# Altium PCB PCB3.PcbDoc
Units mil, origin at the board's own origin, x right, y up, seen from the top; angles counter-clockwise.
Board outline 1140.68 x 645 mil, 2 copper layers (Top Layer, Bottom Layer); 8 components, 15 nets, 53 pads, 6 vias.
Unrouted connection lines stored in the file: 6.
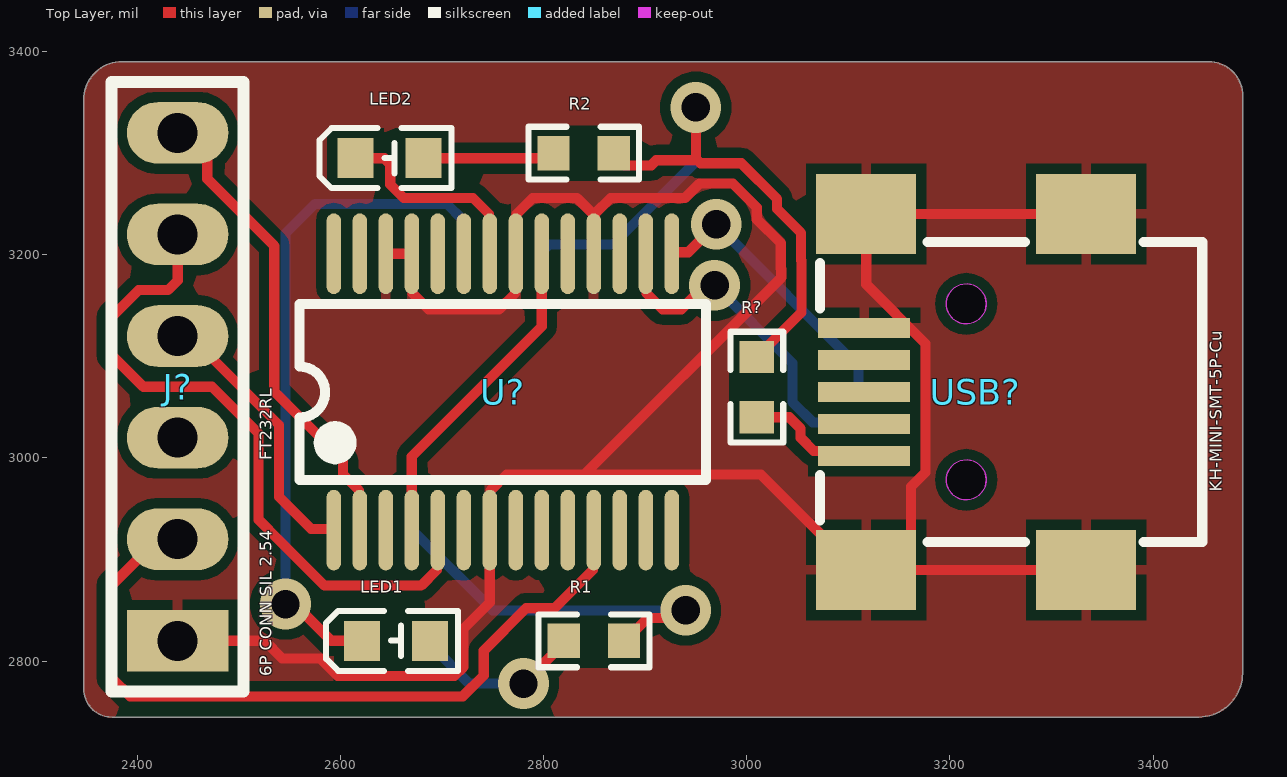
[diagram p0: Top Layer view]
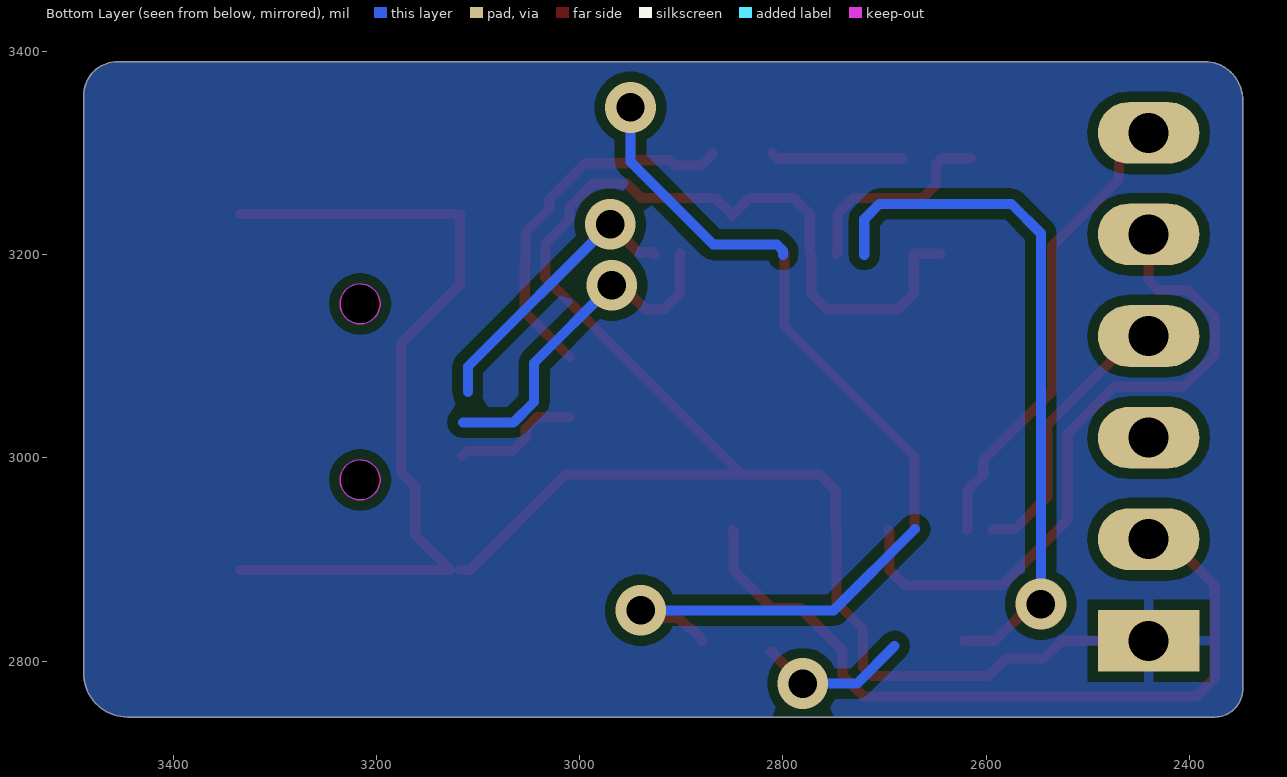
[diagram p1: Bottom Layer view, seen from below]

## Layer stack, top to bottom
Top Solder: solder mask 0.4, Solder Resist, Dk 3.5
Top Layer: signal copper 1.4
Dielectric 1: dielectric 12.6, FR-4, Dk 4.8
Bottom Layer: signal copper 1.4
Bottom Solder: solder mask 0.4, Solder Resist, Dk 3.5

## Board outline
2375,2745 3445,2745 ccw(c3445,2788.18) 3488.18,2788.18 3488.18,3356.82 ccw(c3455,3356.82) 3455,3390 2385,3390 ccw(c2385,3352.5) 2347.5,3352.5 2347.5,2772.5 ccw(c2375,2772.5)

## Design rules (kind name [scope] priority, off if disabled: settings)
Clearance [All] p1: gap=10 ignorepadtopadclearanceinfootprint=FALSE
PolygonConnect [All] p1: connectstyle=Relief reliefconductorwidth=10 reliefentries=4 polygonreliefangle="90 Angle" airgapwidth=10
RoutingVias [All] p1: holewidth=28 width=50 viastyle="Through Hole" minholewidth=28 minwidth=50 maxholewidth=28 maxwidth=50
SolderMaskExpansion [All] p1: expansion=4 istentingtop=FALSE
SupplyNets "Schematic Supply Nets" [InNet('GND')] p1: voltage=0.000
Width [All] p1: maxlimit=10 minlimit=10 preferedwidth=10
30 further rules are at their usual default settings.

## Classes and differential pairs
component class Sheet3: J? LED1 R1 R2 U? USB?

## Components (designator, comment, footprint, x,y, rotation, side; value= is the part's Value field where it differs from the comment)
J? "6P CONN SIL 2.54" "6P CONN SIL 2.54" 2440,3070 r0 top
LED1 "YLED0603R" LED0603-FD 2655,2820 r180 top
LED2 "YLED0603R" LED0603-FD 2648.47,3295 r180 top
R1 "2kΩ" R0603 2849.66,2820 r0 top
R2 "2kΩ" R0603 2839.66,3300 r0 top
R? "2kΩ" R0603 3010,3069.66 r90 top
U? "FT232RL" SSOP-28_L10.2-W5.3-P0.65-LS7.8-BL 2760,3065 r0 top
USB? "KH-MINI-SMT-5P-Cu" MINI-USB-SMD_KH-MINI-SMT-5P-CU 3225,3065 r90 top

## Footprints (in the part's own frame and the unit in brackets; to place one, negate y for a bottom-side part, rotate by r counter-clockwise, add the part's x,y. Pads: shape width x height; smd on the part's side, far side on the other; paste and mask are expansions set on the pad)
"6P CONN SIL 2.54" [mm]
  rect 2.54x1.54 hole 1 paste-2539.97 mask+0.2: 1(0,-6.35)
  oval 2.54x1.54 hole 1 paste-2539.97 mask+0.2: 2(0,-3.81) 3(0,-1.27) 4(0,1.27) 5(0,3.81) 6(0,6.35)
  silkscreen extent -1.65,-7.62 1.65,7.62
LED0603-FD [mm]
  rect 0.9x1 smd: 1(-0.85,0) 2(0.85,0)
  silkscreen extent -1.55,-0.75 1.75,0.75
MINI-USB-SMD_KH-MINI-SMT-5P-CU [mm]
  rect 0.5x2.3 smd paste+0 mask+0.05: 1(-1.6,2.775) 2(-0.8,2.775) 3(0,2.775) 4(0.8,2.775) 5(1.6,2.775)
  rect 2x2.5 smd paste+0 mask+0.05: 6(-4.45,-2.775) 7(-4.45,2.725) 8(4.45,-2.775) 9(4.45,2.725)
  Keep-Out Layer board cut-out: 2.7,0.225 2.65,0.008 2.512,-0.166 2.311,-0.263 2.089,-0.263 1.888,-0.166 1.749,0.008 1.7,0.225 1.7,0.225 1.749,0.442 1.888,0.616 2.089,0.712 2.311,0.712 2.512,0.616 2.65,0.442 2.7,0.225
  Keep-Out Layer board cut-out: -1.7,0.225 -1.749,0.008 -1.888,-0.166 -2.089,-0.263 -2.311,-0.263 -2.512,-0.166 -2.65,0.008 -2.7,0.225 -2.7,0.225 -2.65,0.442 -2.512,0.616 -2.311,0.712 -2.089,0.712 -1.888,0.616 -1.749,0.442 -1.7,0.225
  Keep-Out Layer circle w0.025: c2.2,0.225 r0.5
  Keep-Out Layer circle w0.025: c-2.2,0.225 r0.5
  Keep-Out Layer region: 2.7,0.225 2.65,0.008 2.512,-0.166 2.311,-0.263 2.089,-0.263 1.888,-0.166 1.749,0.008 1.7,0.225 1.7,0.225 1.749,0.442 1.888,0.616 2.089,0.712 2.311,0.712 2.512,0.616 2.65,0.442 2.7,0.225
  Keep-Out Layer region: -1.7,0.225 -1.749,0.008 -1.888,-0.166 -2.089,-0.263 -2.311,-0.263 -2.512,-0.166 -2.65,0.008 -2.7,0.225 -2.7,0.225 -2.65,0.442 -2.512,0.616 -2.311,0.712 -2.089,0.712 -1.888,0.616 -1.749,0.442 -1.7,0.225
  silkscreen extent -3.75,-5.67 3.75,3.89
R0603 [mil]
  rect 31.75x34.02 smd paste-3937.01 mask+2: 1(-29.66,0) 2(29.66,0)
  silkscreen extent -55,-26 55,26
SSOP-28_L10.2-W5.3-P0.65-LS7.8-BL [mil]
  oval 14.33x79.35 smd: 1(-166.34,-136.03) 2(-140.75,-136.03) 3(-115.16,-136.03) 4(-89.57,-136.03) 5(-63.98,-136.03) 6(-38.39,-136.03) 7(-12.79,-136.03) 8(12.8,-136.03) 9(38.39,-136.03) 10(63.98,-136.03) 11(89.57,-136.03) 12(115.16,-136.03) 13(140.75,-136.03) 14(166.34,-136.03) 15(166.34,136.03) 16(140.75,136.03) 17(115.16,136.03) 18(89.57,136.03) 19(63.98,136.03) 20(38.39,136.03) 21(12.8,136.03) 22(-12.79,136.03) 23(-38.39,136.03) 24(-63.98,136.03) 25(-89.57,136.03) 26(-115.16,136.03) 27(-140.75,136.03) 28(-166.34,136.03)
  silkscreen extent -200,-87 200,87

## Part data
LED1 LED2: Color Temperature=-, Emitted Color=Red, Forward Current=25mA, Forward Voltage (VF)=1.8V~2.4V, JLCPCB Part Class="Extended Part", Manufacturer=YONGYUTAI(永裕泰), Operating Temperature=-40℃~+85℃, Add into BOM=yes, Convert to PCB=yes, Datasheet=https://atta.szlcsc.com/upload/public/pdf/source/20231027/FB19AF06E2C70028E58AB5CEDD1BDC72.pdf, Device=YLED0603R, Diode Configuration=-, Dominant Wavelength=620nm~625nm, LCSC Part Name=YLED0603R, Lens Color=-, Luminous Intensity=-, Manufacturer Part=YLED0603R, Mounting Sytle=-, Peak Wavelength=-, Power Dissipation=-, Supplier=LCSC, Supplier Footprint=0603, Supplier Part=C19171390, Symbol=YLED0603R, Viewing Angle=-
R1 R2 R?: library part 0603WAF2001T5E, JLCPCB Part Class="Basic Part", LCSC Part Name="2kΩ ±1% 100mW 厚膜电阻", Manufacturer=UNI-ROYAL(厚声), Operating Temperature Range=-55℃~+155℃, Temperature Coefficient=±100ppm/℃, Tolerance=±1%, Add into BOM=yes, Convert to PCB=yes, Datasheet=https://atta.szlcsc.com/upload/public/pdf/source/20200306/C422600_1E6D84923E4A46A82E41ADD87F860B5C.pdf, Device=0603WAF2001T5E, Manufacturer Part=0603WAF2001T5E, Supplier=LCSC, Supplier Footprint=0603, Supplier Part=C22975, Symbol=0603WAF2001T5E, Type="Thick Film Resistors"
U?: JLCPCB Part Class="Extended Part", LCSC Part Name="FT232R USB UART IC", Manufacturer=FTDI(飞特帝亚), Operating Temperature=-40℃~+85℃, Voltage - Supply=4V~5.25V；3.3V~5.25V, Add into BOM=yes, Applications Function="USB to UART", Convert to PCB=yes, Data Rate=-, Datasheet=https://atta.szlcsc.com/upload/public/pdf/source/20200318/C490691_690E4DF63E1AFF9F26AE376DE8985AE3.pdf, Device=FT232RL, Manufacturer Part=FT232RL, Number of Channels=-, Protocol="USB 2.0", Supplier=LCSC, Supplier Footprint=SSOP-28-208mil, Supplier Part=C490691, Symbol=FT232RL
USB?: Current Rating - Power (Max)=1A, JLCPCB Part Class="Extended Part", LCSC Part Name="Mini-B 母 卧贴", Manufacturer=kinghelm(金航标), Operating Temperature Range=-, Add into BOM=yes, Connector Type=Mini-B, Contact Material=-, Contact Plating=-, Convert to PCB=yes, Datasheet=https://atta.szlcsc.com/upload/public/pdf/source/20210202/C2688795_BF0BB16DAD2ABFC9845DEEA6AC1A1F9C.pdf, Device=KH-MINI-SMT-5P-Cu, Gender=Female, Manufacturer Part=KH-MINI-SMT-5P-Cu, Mounting Style=卧贴, Number of Contacts=5P, Number of Ports=1, Soldering Temperature(Max)=-, Standard="USB 2.0", Supplier=LCSC, Supplier Footprint=SMD, Supplier Part=C2688795, Symbol=KH-MINI-SMT-5P-CU

## Via types
v1: diameter 50, hole 28, Top Layer to Bottom Layer, 6 vias

## Nets (pads, with @x,y where several pads share a name; then routed paths per layer and width w, separated by ;. In a path a pad name is that pad's centre, name@x,y a point inside that pad or via, vN(x,y) a via of type N, cw(c..) or ccw(c..) an arc to the next point about the centre after c; other vN are vias at no path point)
GND: J?.1 U?.7 U?.18 U?.21 U?.25 U?.26 USB?.5 USB?.6 USB?.7 USB?.8 USB?.9 | length 2601.7
  Top Layer w10: J?.1 2525.64,2820 2542.98,2802.66 2580.26,2802.66 2597.61,2785.31 2712.39,2785.32 2721.18,2794.1 2721.18,2831.68 2747.21,2857.71 U?.7 2748.04,2929.8 2748.04,2968.06 2763.62,2983.64 2840.23,2983.64 ; U?.26 U?.25 2671.26,3200.2 2671.26,3161.94 2686.84,3146.36 2756.39,3146.36 2771.97,3161.94 2771.97,3200.2 2773.63,3201.86 2773.63,3240.12 2789.21,3255.7 2833.16,3255.7 2850.47,3238.4 2850.47,3240.19 2865.98,3255.7 2939.14,3255.7 2953.43,3270 2986.57,3270 3010,3246.57 3010,3235 3033.5,3211.5 3033.5,3186.33 3034.07,3185.77 3034.07,3177.48 2840.23,2983.64 ; USB?.7 3107.87,2889.8 3014.03,2983.64 2840.23,2983.64 ; USB?.6 3127.56,2889.8 3161.93,2924.17 3161.93,2971.86 3176.02,2985.95 3176.02,3112.56 3117.72,3170.86 USB?.9 USB?.8
NetJ?_2: J?.2 U?.11 | length 761.6
  Top Layer w10: J?.2 2420.32,2920 2375,2874.68 2375,2783.47 2393.16,2765.32 2720.68,2765.32 2741.18,2785.82 2741.18,2810.28 2782.91,2852.01 2810.87,2852.01 2848.74,2889.88 2848.74,2928.14 U?.11
NetJ?_3: J?.3
NetJ?_4: J?.4 U?.1 | length 274.1
  Top Layer w10: J?.4 2452.05,3120 2539.7,3032.35 2539.7,2961.79 2571.49,2930 2591.66,2930 2592.69,2928.97 U?.1
NetJ?_5: J?.5 U?.5 | length 672.6
  Top Layer w10: J?.5 2440,3174.68 2430.63,3165.32 2401.55,3165.32 2375,3138.77 2375,3101.23 2406.23,3070 2473.77,3070 2519.7,3024.07 2519.7,2939.07 2541.03,2917.74 2584.48,2874.3 2679.61,2874.3 2695.19,2889.88 2695.19,2928.14 U?.5
NetJ?_6: J?.6 U?.2 | length 468.6
  Top Layer w10: J?.6 2445.7,3320 2469.09,3296.61 2469.09,3274.68 2535,3208.77 2535,3065.34 2602.84,2997.5 2602.84,2983.64 2618.42,2968.06 2618.42,2929.8 U?.2
NetLED1_1: LED1.1 R1.1 | length 151.3
  Top Layer w10: v1(2780.39,2777.9) 2809.12,2806.64 2809.12,2807.99 2810.71,2809.57 R1.1@2812.06,2809.57
  Bottom Layer w10: 2690,2815 2727.1,2777.9 v1(2780.39,2777.9)
NetLED1_2: LED1.2 U?.23 | length 682.5
  Top Layer w10: v1(2546.1,2856.1) 2555.1,2856.1 2591.21,2820 LED1.2
  Bottom Layer w10: v1(2546.1,2856.1) 2546.1,3221.1 2575,3250 2705,3250 2720,3235 2720,3200
NetLED2_1: LED2.1 R2.1 | length 130.1
  Top Layer w10: LED2.1 2805,3295 R2.1
NetLED2_2: LED2.2 U?.22 | length 205.3
  Top Layer w10: LED2.2 2643.36,3295 2649.22,3289.14 2649.22,3269.1 2662.41,3255.91 2730.59,3255.91 2746.38,3240.11 2746.38,3201.86 U?.22
NetR1_2: R1.2 R2.2 R?.2 U?.4 U?.20 | length 1365.9
  Top Layer w10: U?.4 2670.43,3001.43 2798.39,3129.39 U?.20 ; R2.2 2869.32,3298.87 2880.2,3287.99 2906.08,3287.99 2911.08,3292.99 2948.37,3292.99 2950,3294.63 ; R1.2 2880,2820 2880,2821.81 2890.2,2832.01 2892.01,2832.01 2902.35,2842.35 2932.35,2842.35 v1(2940,2850) ; v1(2950,3345) 2950,3294.63 ; R?.2 3054.07,3143.39 3054.07,3194.05 3053.5,3194.62 3053.5,3221.5 3030,3245 3030,3254.85 2994.85,3290 2954.63,3290 2950,3294.63
  Bottom Layer w10: 2670,2930 2750,2850 v1(2940,2850) ; 2800,3200 2800,3204.14 2805.86,3210 2868.52,3210 2950,3291.48 v1(2950,3345)
NetR?_1: R?.1 USB?.1 | length 126.8
  Top Layer w10: R?.1 3042.01,3040 3053.13,3028.88 3053.13,3019.78 3066.06,3006.85 3110.9,3006.85 USB?.1
NetU?_15: U?.15 USB?.3 | length 278.6
  Top Layer w10: U?.15 2927.79,3202.48 2942.48,3202.48 v1(2970,3230)
  Bottom Layer w10: v1(2970,3230) 3110,3090 3110,3065
NetU?_16: U?.16 USB?.2 | length 347.6
  Top Layer w10: U?.16 2901.58,3200.2 2901.58,3161.94 2917.16,3146.36 2935.58,3146.36 2959.23,3170 v1(2968.51,3170)
  Bottom Layer w10: v1(2968.51,3170) 3045,3093.51 3045,3055 3065,3035 3115,3035
NetU?_17: U?.17
pads on no net: U?.3 U?.6 U?.8 U?.9 U?.10 U?.12 U?.13 U?.14 U?.19 U?.24 U?.27 U?.28 USB?.4

## Polygon pours and split planes (outlines as drawn)
GND on Top Layer "GND_L01_P002" (solid, pour order 2): 2375,2745 3445,2745 ccw(c3445,2788.18) 3488.18,2788.18 3488.18,3356.82 ccw(c3455,3356.82) 3455,3390 2385,3390 ccw(c2385,3352.5) 2347.5,3352.5 2347.5,2772.5 ccw(c2375,2772.5)
GND on Top Layer "GND_L01_P000" (solid, pour order 0): 2375,2745 3445,2745 ccw(c3445,2788.18) 3488.18,2788.18 3488.18,3356.82 ccw(c3455,3356.82) 3455,3390 2385,3390 ccw(c2385,3352.5) 2347.5,3352.5 2347.5,2772.5 ccw(c2375,2772.5)
GND on Bottom Layer "GND_L02_P003" (solid, pour order 3): 2375,2745 3445,2745 ccw(c3445,2788.18) 3488.18,2788.18 3488.18,3356.82 ccw(c3455,3356.82) 3455,3390 2385,3390 ccw(c2385,3352.5) 2347.5,3352.5 2347.5,2772.5 ccw(c2375,2772.5)
GND on Bottom Layer "GND_L02_P001" (solid, pour order 1): 2375,2745 3445,2745 ccw(c3445,2788.18) 3488.18,2788.18 3488.18,3356.82 ccw(c3455,3356.82) 3455,3390 2385,3390 ccw(c2385,3352.5) 2347.5,3352.5 2347.5,2772.5 ccw(c2375,2772.5)